# EAGLE board PCB (EAGLE 9.7.0)

No outline drawn. Coordinates in mm, seen from the top.
Copper layers (1*16): Top 0.035mm / dielectric 1.5mm / Bottom 0.035mm
Design rules "Fusion Electronics Design Rules": minimum track width 6mil, minimum drill 0.35mm, track to track 6mil, track to pad 6mil, pad to pad 6mil, via to via 6mil, smd to smd 6mil, copper to edge 40mil, drill to drill 6mil, minimum pad ring 10mil, minimum via ring 8mil, stop-mask expansion 4mil, vias tented up to drill 9999mil, thermal gap 10mil

## Footprints (pad centres in the part's own frame; a part is rotated, then mirrored left to right if it is on the bottom)
2450AT18B100E_ANTC3216X140N = smd 1.15 x 1.8: 1 -1.5,0; 2 1.5,0
ESP32_C6_LIBRARY_1_ESP32_WROVER_EAGLE-LTSPICE_C0402 = smd 0.7 x 0.9: 1 -0.65,0; 2 0.65,0
PERFECT_0402_0402 = smd 0.6 x 0.7: 1 -0.5,0; 2 0.5,0
GRM011R60J152KE01L_1_0201 = smd 0.35 x 0.25: 1 0,0.275; 2 0,-0.275
ESP32_C6_LIBRARY_5_SOD3716X135N = smd 1.15 x 0.8: 1 -1.75,0; 2 1.75,0
ESP32_C6_LIBRARY_3_SOT95P280X145-6N = smd 1.2 x 0.6: 1 -1.25,0.95; 2 -1.25,0; 3 -1.25,-0.95; 4 1.25,-0.95; 5 1.25,0; 6 1.25,0.95
BQ25180YBGR_BGA8C40P2X4_100X155X50 = smd 0.2 x 0.2: A1 -0.2,0.6; A2 0.2,0.6; B1 -0.2,0.2; B2 0.2,0.2; C1 -0.2,-0.2; C2 0.2,-0.2; D1 -0.2,-0.6; D2 0.2,-0.6
RT6160AWSC_BGA15C40P3X5_140X230X60 = smd 0.216 x 0.216: A1 -0.4,0.8; A2 0,0.8; A3 0.4,0.8; B1 -0.4,0.4; B2 0,0.4; B3 0.4,0.4; C1 -0.4,0; C2 0,0; C3 0.4,0; D1 -0.4,-0.4; D2 0,-0.4; D3 0.4,-0.4; E1 -0.4,-0.8; E2 0,-0.8; E3 0.4,-0.8
BMA423_BMA423 = smd 0.3 x 0.35: 1 -0.75,-0.775; 2 -0.25,-0.775; 3 0.25,-0.775; 4 0.75,-0.775; 7 0.75,0.775; 8 0.25,0.775; 9 -0.25,0.775; 10 -0.75,0.775 | smd 0.35 x 0.3: 5 0.775,-0.25; 6 0.775,0.25; 11 -0.775,0.25; 12 -0.775,-0.25
DRV2605YZFR_BGA9C50P3X3_144X144X62 = smd 0.25 x 0.25: A1 -0.5,0.5; A2 0,0.5; A3 0.5,0.5; B1 -0.5,0; B2 0,0; B3 0.5,0; C1 -0.5,-0.5; C2 0,-0.5; C3 0.5,-0.5
TC2030-IDC_TC2030IDC = smd 0.783 x 0.783: 1 -0.953,-0.635; 2 -0.953,0.635; 3 0.317,-0.635; 4 0.317,0.635; 5 1.588,-0.635; 6 1.588,0.635 | hole 2.451: -2.223,-2.54; -2.223,2.54; 0.952,-2.54; 0.952,2.54 | hole 1.067: -2.223,0; 2.857,-1.016; 2.857,1.016
503480-2400_5034802400 = smd 0.3 x 0.7: 1 -5.75,1.525; 2 -5.25,1.525; 3 -4.75,1.525; 4 -4.25,1.525; 5 -3.75,1.525; 6 -3.25,1.525; 7 -2.75,1.525; 8 -2.25,1.525; 9 -1.75,1.525; 10 -1.25,1.525; 11 -0.75,1.525; 12 -0.25,1.525; 13 0.25,1.525; 14 0.75,1.525; 15 1.25,1.525; 16 1.75,1.525; 17 2.25,1.525; 18 2.75,1.525; 19 3.25,1.525; 20 3.75,1.525; 21 4.25,1.525; 22 4.75,1.525; 23 5.25,1.525; 24 5.75,1.525 | smd 0.3 x 1: MP1 -6.54,-1.125; MP2 6.54,-1.125
KH-TYPE-C-16P_KINGHELM_KH-TYPE-C-16P = smd 0.6 x 1.15: A1_B12 -3.2,4.725; A4_B9 -2.4,4.725; A9_B4 2.4,4.725; A12_B1 3.2,4.725 | smd 0.3 x 1.15: A5 -1.25,4.725; A6 -0.25,4.725; A7 0.25,4.725; A8 1.25,4.725; B5 1.75,4.725; B6 0.75,4.725; B7 -0.75,4.725; B8 -1.75,4.725 | drill 0.65 pad 1.05: SH1 -4.32,0; SH2 4.32,0; SH3 -4.32,4.15; SH4 4.32,4.15 | hole 0.7: -2.89,3.65; 2.89,3.65
MLP2016SR47MT0S1_INDC2016X100N = smd 1.2 x 2.2: 1 -1.028,0; 2 1.028,0
ESP32_C6_LIBRARY_2_IND_4828-WE-TPC_WRE = smd 0.9 x 5.3: 1 -2.286,0; 2 2.286,0
ESP32_C6_LIBRARY_6_SOT65P210X110-3N = smd 1.05 x 0.5: 1 -1.05,0.65; 2 -1.05,-0.65; 3 1.05,0
ESP32_C6_LIBRARY_4_ESP32_C6_LIBRARY_4_ESP32_C6_LIBRARY_4_ESP32_C6_LIBRARY_4_ESP32_WROVER_SPARKFUN-DISCRETESEMI_SOT23-3 = smd 0.8 x 0.9: 1 -0.95,-1; 2 0.95,-1; 3 0,1.1
CPF0201D7K68C1_0201 = smd 0.35 x 0.25: 1 0,0.275; 2 0,-0.275
NORDIC_NRF_4_AQFN50P700X700X85_HS-74N = smd 4.85 x 4.85: P$74 0,0 | drill 0.3 pad 0.6: P$75 -1.8,1.8; P$76 -0.6,1.8; P$77 0.6,1.8; P$78 1.8,1.8; P$79 -1.8,0.6; P$80 -0.6,0.6; P$81 0.6,0.6; P$82 1.8,0.6; P$83 -1.8,-0.6; P$84 -0.6,-0.6; P$85 0.6,-0.6; P$86 1.8,-0.6; P$87 -1.8,-1.8; P$88 -0.6,-1.8; P$89 0.6,-1.8; P$90 1.8,-1.8 | smd 0.2 x 0.2: P$A8 -1.25,3.25; P$A10 -0.75,3.25; P$A12 -0.25,3.25; P$A14 0.25,3.25; P$A16 0.75,3.25; P$A18 1.25,3.25; P$A20 1.75,3.25; P$A22 2.25,3.25; P$A23 2.75,3.25; P$AA24 3.25,-2.25; P$AB2 -2.75,-2.5; P$AC5 -2,-2.75; P$AC9 -1,-2.75; P$AC11 -0.5,-2.75; P$AC13 0,-2.75; P$AC15 0.5,-2.75; P$AC17 1,-2.75; P$AC19 1.5,-2.75; P$AC21 2,-2.75; P$AC24 3.25,-2.75; P$AD2 -2.75,-3.25; P$AD4 -2.25,-3.25; P$AD6 -1.75,-3.25; P$AD8 -1.25,-3.25; P$AD10 -0.75,-3.25; P$AD12 -0.25,-3.25; P$AD14 0.25,-3.25; P$AD16 0.75,-3.25; P$AD18 1.25,-3.25; P$AD20 1.75,-3.25; P$AD22 2.25,-3.25; P$AD23 2.75,-3.25; P$B1 -3.25,2.75; P$B3 -2.5,2.75; P$B5 -2,2.75; P$B7 -1.5,2.75; P$B9 -1,2.75; P$B11 -0.5,2.75; P$B13 0,2.75; P$B15 0.5,2.75; P$B17 1,2.75; P$B19 1.5,2.75; P$B24 3.25,2.75; P$C1 -3.25,2.25; P$D2 -2.75,2; P$D23 2.75,2; P$E24 3.25,1.75; P$F2 -2.75,1.5; P$F23 2.75,1.5; P$G1 -3.25,1.25; P$H2 -2.75,1; P$H23 2.75,1; P$J1 -3.25,0.75; P$J24 3.25,0.75; P$K2 -2.75,0.5; P$L1 -3.25,0.25; P$L24 3.25,0.25; P$M2 -2.75,0; P$N1 -3.25,-0.25; P$N24 3.25,-0.25; P$P2 -2.75,-0.5; P$P23 2.75,-0.5; P$R1 -3.25,-0.75; P$R24 3.25,-0.75; P$T2 -2.75,-1; P$T23 2.75,-1; P$U1 -3.25,-1.25; P$U24 3.25,-1.25; P$V23 2.75,-1.5; P$W1 -3.25,-1.75; P$W24 3.25,-1.75; P$Y2 -2.75,-2; P$Y23 2.75,-2
ESP32_C6_LIBRARY_7_JUMPER_SJ = smd 1.168 x 1.6: 1 -0.762,0; 2 0.762,0
2025-10-22_07-23-44_LIBRARY_SW_EVP-AKE31A_PAN = smd 0.711 x 1.092: 1 -1.4,-0.972; 2 1.4,-0.972 | drill 0.559 pad 0.914 square: 3 -1.848,0.381; 4 1.848,0.381 | smd 1.397 x 1.092: 5 0,-1.124
HECTOR_WATCH_1_TP20R = smd 2 x 2: TP 0,0
ESP32_C6_LIBRARY_SON50P200X200X80-9N = smd 0.76 x 0.27: 1 -0.985,0.75; 2 -0.985,0.25; 3 -0.985,-0.25; 4 -0.985,-0.75; 5 0.985,-0.75; 6 0.985,-0.25; 7 0.985,0.25; 8 0.985,0.75 | smd 0.9 x 1.3: 9 0,0
NORDIC_NRF_1_XTAL_3215_N = smd 1 x 1.8: 1 -1.25,0; 2 1.25,0
NORDIC_NRF_BT-XTAL_2016_N = smd 0.95 x 0.85: 1 -0.725,-0.575; 2 0.725,-0.575; 3 0.725,0.575; 4 -0.725,0.575
NORDIC_NRF_2_RESC0402_L = smd 0.5 x 0.6: 1 -0.5,0; 2 0.5,0

## Placement (x,y rotation side)
ANT1  2450AT18B100E_2450AT18B100E  [2450AT18B100E_ANTC3216X140N]  -27.94,167.64 0 top
C1  1uF  [ESP32_C6_LIBRARY_1_ESP32_WROVER_EAGLE-LTSPICE_C0402]  -22.86,149.86 0 top
C2  10uF  [ESP32_C6_LIBRARY_1_ESP32_WROVER_EAGLE-LTSPICE_C0402]  -17.78,149.86 0 top
C3  1uF  [ESP32_C6_LIBRARY_1_ESP32_WROVER_EAGLE-LTSPICE_C0402]  -27.94,149.86 0 top
C4  10uF  [PERFECT_0402_0402]  -36.83,160.02 0 top
C5  22uF  [PERFECT_0402_0402]  -40.64,160.02 0 top
C6  22uF  [PERFECT_0402_0402]  -44.45,160.02 0 top
C7  0.1uF  [GRM011R60J152KE01L_1_0201]  -44.45,167.64 0 top
C8  100nF  [GRM011R60J152KE01L_1_0201]  -46.99,167.64 0 top
C9  12pF  [GRM011R60J152KE01L_1_0201]  -49.53,167.64 0 top
C10  12pF  [GRM011R60J152KE01L_1_0201]  -52.07,167.64 0 top
C11  12pF  [GRM011R60J152KE01L_1_0201]  -54.61,167.64 0 top
C12  12pF  [GRM011R60J152KE01L_1_0201]  -57.15,167.64 0 top
C13  1pF  [GRM011R60J152KE01L_1_0201]  -59.69,167.64 0 top
C14  1pF  [GRM011R60J152KE01L_1_0201]  -62.23,167.64 0 top
C15  1pF  [GRM011R60J152KE01L_1_0201]  -64.77,167.64 0 top
C16  1pF  [GRM011R60J152KE01L_1_0201]  -67.31,167.64 0 top
C17  820pF  [GRM011R60J152KE01L_1_0201]  -69.85,167.64 0 top
C18  100nF  [GRM011R60J152KE01L_1_0201]  -72.39,167.64 0 top
C19  100nF  [GRM011R60J152KE01L_1_0201]  -74.93,167.64 0 top
C20  4.7uF  [GRM011R60J152KE01L_1_0201]  -77.47,167.64 0 top
C21  4.7uF  [GRM011R60J152KE01L_1_0201]  -80.01,167.64 0 top
C22  100nF  [GRM011R60J152KE01L_1_0201]  -82.55,167.64 0 top
C23  4.7uF  [GRM011R60J152KE01L_1_0201]  -85.09,167.64 0 top
C24  100nF  [GRM011R60J152KE01L_1_0201]  -87.63,167.64 0 top
C25  N.C.  [GRM011R60J152KE01L_1_0201]  -90.17,167.64 0 top
C26  100pF  [GRM011R60J152KE01L_1_0201]  -92.71,167.64 0 top
C27  N.C.  [GRM011R60J152KE01L_1_0201]  -95.25,167.64 0 top
C28  1.0uF  [GRM011R60J152KE01L_1_0201]  -97.79,167.64 0 top
C29  47nF  [GRM011R60J152KE01L_1_0201]  -100.33,167.64 0 top
C30  4.7uF  [GRM011R60J152KE01L_1_0201]  -102.87,167.64 0 top
C31  0.1uF  [PERFECT_0402_0402]  -21.59,160.02 0 top
C32  4.7uF/25V  [PERFECT_0402_0402]  -77.47,154.94 0 top
C33  10uF  [PERFECT_0402_0402]  -48.26,160.02 0 top
C34  1uF/50V  [PERFECT_0402_0402]  -90.17,154.94 0 top
C35  1uF/50V  [PERFECT_0402_0402]  -96.52,154.94 0 top
C36  0.1uF/50V  [PERFECT_0402_0402]  -83.82,154.94 0 top
C37  1uF/50V  [PERFECT_0402_0402]  -102.87,154.94 0 top
C38  1uF/50V  [PERFECT_0402_0402]  -109.22,154.94 0 top
C39  1uF/50V  [PERFECT_0402_0402]  -115.57,154.94 0 top
C40  1uF/50V  [PERFECT_0402_0402]  -121.92,154.94 0 top
C41  1uF/50V  [PERFECT_0402_0402]  -128.27,154.94 0 top
C42  1uF/50V  [PERFECT_0402_0402]  -134.62,154.94 0 top
C43  1uF/50V  [PERFECT_0402_0402]  -17.78,160.02 0 top
C44  1uF  [PERFECT_0402_0402]  -52.07,160.02 0 top
C45  0.1uF  [PERFECT_0402_0402]  -25.4,160.02 0 top
C46  1uF  [PERFECT_0402_0402]  -55.88,160.02 0 top
C47  1uF  [PERFECT_0402_0402]  -59.69,160.02 0 top
C48  1uF  [PERFECT_0402_0402]  -63.5,160.02 0 top
C49  0.1uF  [PERFECT_0402_0402]  -29.21,160.02 0 top
C50  4.7uF  [PERFECT_0402_0402]  -33.02,160.02 0 top
D1  ESP32_C6_LIBRARY_5_MBR0530  [ESP32_C6_LIBRARY_5_SOD3716X135N]  -115.57,160.02 0 top
D2  ESP32_C6_LIBRARY_5_MBR0530  [ESP32_C6_LIBRARY_5_SOD3716X135N]  -27.94,163.83 0 top
D3  ESP32_C6_LIBRARY_5_MBR0530  [ESP32_C6_LIBRARY_5_SOD3716X135N]  -58.42,163.83 0 top
D4  ESP32_C6_LIBRARY_3_USBLC6-2SC6Y  [ESP32_C6_LIBRARY_3_SOT95P280X145-6N]  -82.55,160.02 0 top
IC1  BQ25180YBGR_BQ25180YBGR  [BQ25180YBGR_BGA8C40P2X4_100X155X50]  -58.42,154.94 0 top
IC2  RT6160AWSC_RT6160AWSC  [RT6160AWSC_BGA15C40P3X5_140X230X60]  -26.67,154.94 0 top
IC3  BMA423_BMA423  [BMA423_BMA423]  -38.1,149.86 0 top
IC4  DRV2605YZFR_DRV2605YZFR  [DRV2605YZFR_BGA9C50P3X3_144X144X62]  -102.87,142.24 0 top
J1  TC2030-IDC_TC2030-IDC  [TC2030-IDC_TC2030IDC]  -80.01,132.08 0 top
J2  503480-2400_503480-2400  [503480-2400_5034802400]  -77.47,143.51 0 top
J3  KH-TYPE-C-16P_KH-TYPE-C-16P  [KH-TYPE-C-16P_KINGHELM_KH-TYPE-C-16P]  -36.83,129.54 0 top
L1  MLP2016SR47MT0S1_FTC252012SR47MBCA  [MLP2016SR47MT0S1_INDC2016X100N]  -115.57,130.81 0 top
L2  68uH  [ESP32_C6_LIBRARY_2_IND_4828-WE-TPC_WRE]  -109.22,102.87 0 top
Q1  ESP32_C6_LIBRARY_6_SI1308EDL-T1-GE3  [ESP32_C6_LIBRARY_6_SOT65P210X110-3N]  -92.71,163.83 0 top
Q2  20V/4.2A/52mΩ/1.4W  [ESP32_C6_LIBRARY_4_ESP32_C6_LIBRARY_4_ESP32_C6_LIBRARY_4_ESP32_C6_LIBRARY_4_ESP32_WROVER_SPARKFUN-DISCRETESEMI_SOT23-3]  -92.71,132.08 0 top
R1  10k  [CPF0201D7K68C1_0201]  -105.41,167.64 0 top
R2  3K3  [CPF0201D7K68C1_0201]  -107.95,167.64 0 top
R3  3K3  [CPF0201D7K68C1_0201]  -110.49,167.64 0 top
R4  0  [CPF0201D7K68C1_0201]  -113.03,167.64 0 top
R5  0  [CPF0201D7K68C1_0201]  -115.57,167.64 0 top
R6  0  [CPF0201D7K68C1_0201]  -118.11,167.64 0 top
R7  0.47  [CPF0201D7K68C1_0201]  -120.65,167.64 0 top
R8  10K  [CPF0201D7K68C1_0201]  -123.19,167.64 0 top
R9  2.2  [CPF0201D7K68C1_0201]  -125.73,167.64 0 top
R10  10K  [CPF0201D7K68C1_0201]  -128.27,167.64 0 top
R11  10k  [CPF0201D7K68C1_0201]  -130.81,167.64 0 top
R12  10k  [CPF0201D7K68C1_0201]  -133.35,167.64 0 top
R13  10k  [CPF0201D7K68C1_0201]  -135.89,167.64 0 top
R14  5K1  [CPF0201D7K68C1_0201]  -13.97,170.18 0 top
R15  5K1  [CPF0201D7K68C1_0201]  -16.51,170.18 0 top
RESET  NORDIC_NRF_4_NRF52840_QF  [NORDIC_NRF_4_AQFN50P700X700X85_HS-74N]  -62.23,132.08 0 top
SJ1  [ESP32_C6_LIBRARY_7_JUMPER_SJ]  -41.91,153.67 0 top
SW1  2025-10-22_07-23-44_LIBRARY_EVP-AKE31ASW_EVP-AKE31A_PAN  [2025-10-22_07-23-44_LIBRARY_SW_EVP-AKE31A_PAN]  -69.85,29.21 0 top
SW2  2025-10-22_07-23-44_LIBRARY_EVP-AKE31ASW_EVP-AKE31A_PAN  [2025-10-22_07-23-44_LIBRARY_SW_EVP-AKE31A_PAN]  -69.85,71.12 0 top
SW3  2025-10-22_07-23-44_LIBRARY_EVP-AKE31ASW_EVP-AKE31A_PAN  [2025-10-22_07-23-44_LIBRARY_SW_EVP-AKE31A_PAN]  -69.85,113.03 0 top
TP1  HECTOR_WATCH_1_TPTP20R  [HECTOR_WATCH_1_TP20R]  -81.28,148.59 0 top
TP2  HECTOR_WATCH_1_TPTP20R  [HECTOR_WATCH_1_TP20R]  -86.36,148.59 0 top
TP3  HECTOR_WATCH_1_TPTP20R  [HECTOR_WATCH_1_TP20R]  -91.44,148.59 0 top
TP4  HECTOR_WATCH_1_TPTP20R  [HECTOR_WATCH_1_TP20R]  -96.52,148.59 0 top
TP5  HECTOR_WATCH_1_TPTP20R  [HECTOR_WATCH_1_TP20R]  -101.6,148.59 0 top
TP6  HECTOR_WATCH_1_TPTP20R  [HECTOR_WATCH_1_TP20R]  -106.68,148.59 0 top
TP7  HECTOR_WATCH_1_TPTP20R  [HECTOR_WATCH_1_TP20R]  -111.76,148.59 0 top
TP8  HECTOR_WATCH_1_TPTP20R  [HECTOR_WATCH_1_TP20R]  -116.84,148.59 0 top
TP9  HECTOR_WATCH_1_TPTP20R  [HECTOR_WATCH_1_TP20R]  -121.92,148.59 0 top
TP10  HECTOR_WATCH_1_TPTP20R  [HECTOR_WATCH_1_TP20R]  -50.8,148.59 0 top
TP11  HECTOR_WATCH_1_TPTP20R  [HECTOR_WATCH_1_TP20R]  -76.2,148.59 0 top
TP12  HECTOR_WATCH_1_TPTP20R  [HECTOR_WATCH_1_TP20R]  -57.15,148.59 0 top
TP13  HECTOR_WATCH_1_TPTP20R  [HECTOR_WATCH_1_TP20R]  -63.5,148.59 0 top
TP14  HECTOR_WATCH_1_TPTP20R  [HECTOR_WATCH_1_TP20R]  -69.85,148.59 0 top
U1  ESP32_C6_LIBRARY_MAX17048G+T10  [ESP32_C6_LIBRARY_SON50P200X200X80-9N]  -52.07,143.51 0 top
U$1  32.768kHz  [NORDIC_NRF_1_XTAL_3215_N]  -60.96,143.51 0 top
U$2  32MHz  [NORDIC_NRF_BT-XTAL_2016_N]  -16.51,143.51 0 top
U$3  3.9nH  [NORDIC_NRF_2_RESC0402_L]  -121.92,142.24 0 top
U$4  15nH  [NORDIC_NRF_2_RESC0402_L]  -128.27,142.24 0 top
U$5  10uH  [NORDIC_NRF_2_RESC0402_L]  -134.62,142.24 0 top

## Library data of the parts
ANT1 = InkTime_v5; ARROW_PART_NUMBER: 2450AT18B100E; ARROW_PRICE-STOCK: https://www.arrow.com/en/products/2450at18b100e/johanson-dielectrics?utm_currency=USD&region=nac; DESCRIPTION: Antennas 2.45GHz ANTENNA; HEIGHT: 1.4mm; MANUFACTURER_NAME: JOHANSON TECHNOLOGY; MANUFACTURER_PART_NUMBER: 2450AT18B100E; MOUSER_PART_NUMBER: 609-2450AT18B100E; MOUSER_PRICE-STOCK: https://www.mouser.co.uk/ProductDetail/Johanson-Technology/2450AT18B100E?qs=yCnrNFeXz%252Bh5MFsFIXGZGA%3D%3D
C1-C3 = InkTime_v5; SPICEMODEL: NONE; SPICEPREFIX: C
C4-C50 R1-R15 RESET SJ1 TP1-TP14 U$1-U$5 = InkTime_v5
D1-D3 = InkTime_v5; AVAILABILITY: In Stock; CHECK_PRICES: https://www.snapeda.com/parts/MBR0530/Onsemi/view-part/?ref=eda; DESCRIPTION: Diode Schottky 30 V 500mA Surface Mount SOD-123; MF: ON Semiconductor; MP: MBR0530; PACKAGE: SOD-123-2 ON Semiconductor; PRICE: None; PURCHASE-URL: https://www.snapeda.com/api/url_track_click_mouser/?unipart_id=179458&manufacturer=ON Semiconductor&part_name=MBR0530&search_term=None; SNAPEDA_LINK: https://www.snapeda.com/parts/MBR0530/Onsemi/view-part/?ref=snap
D4 = InkTime_v5; AVAILABILITY: In Stock; CHECK_PRICES: https://www.snapeda.com/parts/USBLC6-2SC6Y/STMicroelectronics/view-part/?ref=eda; DESCRIPTION: 17V Clamp 5A (8/20µs) Ipp Tvs Diode Surface Mount SOT-23-6; MF: STMicroelectronics; MP: USBLC6-2SC6Y; PACKAGE: SOT-23-6 STMicroelectronics; PRICE: None; SNAPEDA_LINK: https://www.snapeda.com/parts/USBLC6-2SC6Y/STMicroelectronics/view-part/?ref=snap
IC1 = InkTime_v5; ARROW_PART_NUMBER: BQ25180YBGR; ARROW_PRICE-STOCK: https://www.arrow.com/en/products/bq25180ybgr/texas-instruments?utm_currency=USD&region=nac; DESCRIPTION: Charger IC Lithium Ion/Polymer, Lithium Iron Phosphate 8-DSBGA (1.6x1.1); HEIGHT: 0.5mm; MANUFACTURER_NAME: Texas Instruments; MANUFACTURER_PART_NUMBER: BQ25180YBGR; MOUSER_PART_NUMBER: 595-BQ25180YBGR; MOUSER_PRICE-STOCK: https://www.mouser.co.uk/ProductDetail/Texas-Instruments/BQ25180YBGR?qs=doiCPypUmgEWjAK%252BJAX6Tw%3D%3D
IC2 = InkTime_v5; DESCRIPTION: Buck-Boost Regulator Positive Output Step-Up/Step-Down I2C DC-DC Controller IC 15-WL-CSP (BSC) (1.4x2.3); HEIGHT: 0.6mm; MANUFACTURER_NAME: RICHTEK; MANUFACTURER_PART_NUMBER: RT6160AWSC; MOUSER_PART_NUMBER: 835-RT6160AWSC; MOUSER_PRICE-STOCK: https://www.mouser.co.uk/ProductDetail/Richtek/RT6160AWSC?qs=amGC7iS6iy%2FLd9PSoixZXQ%3D%3D
IC3 = InkTime_v5; ARROW_PART_NUMBER: BMA423; ARROW_PRICE-STOCK: https://www.arrow.com/en/products/bma423/bosch; DESCRIPTION: Accelerometers Triaxial low-g 12bit Acceleration Sensor; HEIGHT: 1mm; MANUFACTURER_NAME: BOSCH; MANUFACTURER_PART_NUMBER: BMA423; MOUSER_PART_NUMBER: 262-BMA423; MOUSER_PRICE-STOCK: https://www.mouser.co.uk/ProductDetail/Bosch-Sensortec/BMA423?qs=HXFqYaX1Q2xC%252BSgeGoX3mg%3D%3D
IC4 = InkTime_v5; ARROW_PART_NUMBER: DRV2605YZFR; ARROW_PRICE-STOCK: https://www.arrow.com/en/products/drv2605yzfr/texas-instruments?region=nac; DESCRIPTION: Haptic Driver for ERM/LRA with Built-In Library and Smart Loop Architecture; HEIGHT: 0.625mm; MANUFACTURER_NAME: Texas Instruments; MANUFACTURER_PART_NUMBER: DRV2605YZFR
J1 = InkTime_v5; DESCRIPTION: CABLE ADAPTER 6 POS; HEIGHT: 19mm; MANUFACTURER_NAME: Tag Connect; MANUFACTURER_PART_NUMBER: TC2030-IDC
J2 = InkTime_v5; DESCRIPTION: FFC & FPC Connectors 0.5mm FPC RA SMT Dual Contact 24Ckt; HEIGHT: 1.87mm; MANUFACTURER_NAME: Molex; MANUFACTURER_PART_NUMBER: 503480-2400; MOUSER_PART_NUMBER: 538-503480-2400; MOUSER_PRICE-STOCK: https://www.mouser.co.uk/ProductDetail/Molex/503480-2400?qs=OAhjpuo3Vu7efIoxFh9AOw%3D%3D
J3 = InkTime_v5; AVAILABILITY: Not in stock; CHECK_PRICES: https://www.snapeda.com/parts/KH-TYPE-C-16P/Kinghelm/view-part/?ref=eda; MF: kinghelm; MP: KH-TYPE-C-16P; PACKAGE: None; PRICE: None; SNAPEDA_LINK: https://www.snapeda.com/parts/KH-TYPE-C-16P/Kinghelm/view-part/?ref=snap
L1 = InkTime_v5; DESCRIPTION: SMD / SMT Inductors (Coils), L=0.47?H, L x W x T :; HEIGHT: 1mm; JLCPCB: https://jlcpcb.com/partdetail/6763488-FTC252012SR47MBCA/C5832368; MANUFACTURER_NAME: TDK; MANUFACTURER_PART_NUMBER: FTC252012SR47MBCA
L2 = InkTime_v5; COPYRIGHT: Copyright (C) 2024 Ultra Librarian. All rights reserved.; MANUFACTURER_PART_NUMBER: 744043680; MFR_NAME: Wurth Electronics
Q1 = InkTime_v5; AVAILABILITY: In Stock; CHECK_PRICES: https://www.snapeda.com/parts/SI1308EDL-T1-GE3/Vishay+Siliconix/view-part/?ref=eda; DESCRIPTION: Si1308EDL-T1-GE3 N-channel MOSFET Transistor, 1.5 A, 30 V, 3-Pin SC-70 | Siliconix / Vishay SI1308EDL-T1-GE3; MF: Vishay Siliconix; MP: SI1308EDL-T1-GE3; PACKAGE: SOT-323 Vishay Semiconductor; PRICE: None; PURCHASE-URL: https://www.snapeda.com/api/url_track_click_mouser/?unipart_id=274603&manufacturer=Vishay Siliconix&part_name=SI1308EDL-T1-GE3&search_term=None; SNAPEDA_LINK: https://www.snapeda.com/parts/SI1308EDL-T1-GE3/Vishay+Siliconix/view-part/?ref=snap
Q2 = InkTime_v5; PROD_ID: TRAN-14388
SW1-SW3 = InkTime_v5; COPYRIGHT: Copyright (C) 2025 Ultra Librarian. All rights reserved.; DIGI-KEY_PART_NUMBER_1: P123437TR-ND; DIGI-KEY_PART_NUMBER_2: P123437CT-ND; DIGI-KEY_PART_NUMBER_3: P123437DKR-ND; MANUFACTURER_NAME: Panasonic; MANUFACTURER_PART_NUMBER: EVP-AKE31A
U1 = InkTime_v5; AVAILABILITY: In Stock; CHECK_PRICES: https://www.snapeda.com/parts/MAX17048G+T10/Analog+Devices/view-part/?ref=eda; DESCRIPTION: 3µA 1-Cell/2-Cell Fuel Gauge with ModelGauge; MF: Analog Devices; MP: MAX17048G+T10; PACKAGE: TDFN-8 Maxim; PRICE: None; PURCHASE-URL: https://www.snapeda.com/api/url_track_click_mouser/?unipart_id=329239&manufacturer=Analog Devices&part_name=MAX17048G+T10&search_term=None; SNAPEDA_LINK: https://www.snapeda.com/parts/MAX17048G+T10/Analog+Devices/view-part/?ref=snap

## Nets
3V3: C5.1 C6.1 C8.2 C19.2 C23.2 C24.1 C30.2 C45.1 IC2.E3 IC3.3 IC3.7 IC3.10 IC4.C2 J1.1 Q2.2 R10.2 R11.2 R12.2 R13.2 RESET.P$A22 RESET.P$AD14 RESET.P$B1 RESET.P$W1 RESET.P$Y2 TP3.TP
3V3/2.4A: R2.1 R3.1 TP9.TP
ALERT: RESET.P$J24 U1.5
D+: D4.4 RESET.P$AD6
D-: D4.6 RESET.P$AD4
DN: D4.1 J3.A7 J3.B7
DP: D4.3 J3.A6 J3.B6
EPD_3V3: C36.2 J2.15 J2.16 Q2.3
EPD_BUSY: J2.9 RESET.P$AD12
EPD_CS: J2.12 RESET.P$K2
EPD_DC: J2.11 RESET.P$AD10
EPD_RST: J2.10 RESET.P$AC11
GDR: J2.2 Q1.1 R8.2
GND: C1.2 C2.2 C3.2 C4.1 C5.2 C6.2 C7.2 C8.1 C9.1 C10.1 C11.2 C12.2 C13.2 C14.2 C15.2 C17.2 C18.2 C19.1 C20.1 C21.1 C22.1 C23.1 C24.2 C25.2 C26.2 C27.2 C28.2 C29.2 C30.1 C31.2 C33.2 C34.1 C35.1 C36.1 C37.1 C38.1 C39.1 C40.1 C41.1 C42.1 C43.1 C44.2 C45.2 C46.2 C47.2 C48.2 C49.2 C50.2 D2.1 D4.2 IC1.D2 IC2.B1 IC2.C1 IC2.C2 IC2.C3 IC3.1 IC3.8 IC3.9 IC4.B1 IC4.B3 J1.3 J1.5 J2.8 J2.17 J2.MP1 J2.MP2 J3.A1_B12 J3.A12_B1 J3.SH1 J3.SH2 J3.SH3 J3.SH4 R1.1 R6.1 R6.2 R8.1 R9.1 R14.1 R15.2 RESET.P$74 RESET.P$75 RESET.P$76 RESET.P$77 RESET.P$78 RESET.P$79 RESET.P$80 RESET.P$81 RESET.P$82 RESET.P$83 RESET.P$84 RESET.P$85 RESET.P$86 RESET.P$87 RESET.P$88 RESET.P$89 RESET.P$90 RESET.P$B7 RESET.P$F23 SJ1.1 SW1.1 SW2.1 SW3.1 TP10.TP TP12.TP U1.1 U1.4 U1.6 U1.9 U$2.2 U$2.4
HAPTIC_EN: IC4.A1 RESET.P$U1
IMU_INT1: IC3.5 RESET.P$N1
IMU_INT2: IC3.6 RESET.P$P2
LX1: IC2.B2 L1.1
LX2: IC2.D2 IC2.D3 L1.2
MOSI: J2.14 RESET.P$B13
N$1: C11.1 RESET.P$A23 U$2.3
N$2: C12.1 RESET.P$B24 U$2.1
N$3: IC1.D1 R1.2
N$4: ANT1.1 C14.1 C15.1 U$3.2
N$5: C13.1 RESET.P$H23 U$3.1
N$6: C17.1 RESET.P$N24
N$7: C18.1 RESET.P$AD23
N$8: C27.1 RESET.P$A18
N$9: C25.1 C28.1 C29.1 RESET.P$B5 RESET.P$E24 U$4.2
N$10: C26.1 RESET.P$D23
N$11: U$4.1 U$5.2
N$12: IC2.E1 R5.2
N$13: IC2.D1 R4.2
N$14: RESET.P$B3 U$5.1
N$15: C33.1 L2.2
N$16: C32.2 D3.2 L2.1 Q1.3
N$17: C32.1 D1.1 D2.2
N$18: C34.2 J2.4
N$19: C31.1 U1.3
N$20: C35.2 J2.5
N$21: C44.1 IC4.A2
N$23: R7.1 R9.2 SJ1.2
N$24: C37.2 J2.18
N$25: C38.2 J2.19
N$26: C39.2 J2.20
N$27: J3.B5 R15.1
N$28: C41.2 J2.22
N$29: J3.A5 R14.2
N$30: C43.2 J2.24
OUT+: IC4.A3 TP14.TP
OUT-: IC4.C3 TP13.TP
P0.00/XL1: C9.2 RESET.P$D2 U$1.1
P0.01/XL2: C10.2 RESET.P$F2 U$1.2
P0.04: RESET.P$J1
P0.09: RESET.P$L24
P0.13: C46.1 R11.1 RESET.P$AD8 SW1.2
P0.14: C47.1 R12.1 RESET.P$AC9 SW2.2
P0.19: RESET.P$AC15
P0.20: RESET.P$AD16
P0.21: RESET.P$AC17
P0.22: RESET.P$AD18
P0.23: RESET.P$AC19
P0.24: RESET.P$AD20
P0.25: RESET.P$AC21
P0.26: RESET.P$G1
P0.27: RESET.P$H2
P0.28: RESET.P$B11
P0.29: RESET.P$A10
P0.30: RESET.P$B9
P0.31: RESET.P$A8
P1.01: Q2.1 R10.1 RESET.P$Y23
P1.02: C48.1 R13.1 RESET.P$W24 SW3.2
P1.03: RESET.P$V23
P1.04: RESET.P$U24
P1.05: RESET.P$T23
P1.06: RESET.P$R24
P1.07: RESET.P$P23
P1.09: RESET.P$R1
P1.10: RESET.P$A20
P1.11: RESET.P$B19
P1.12: RESET.P$B17
P1.13: RESET.P$A16
P1.14: RESET.P$B15
P1.15: RESET.P$A14
PMIC_INT: IC1.A1 RESET.P$T2
PREVGH: C40.2 D3.1 J2.21
PREVGL: C42.2 D1.2 J2.23
RESE: J2.3 Q1.2 R7.2
RESET: J1.6 RESET.P$AC13 TP8.TP
SCK: J2.13 RESET.P$A12
SCL: IC1.B1 IC3.12 IC4.C1 R2.2 R4.1 RESET.P$M2 TP1.TP U1.7
SDA: IC1.C1 IC3.2 IC4.B2 R3.2 R5.1 RESET.P$L1 TP2.TP U1.8
SWDCLK: J1.4 RESET.P$AA24 TP7.TP
SWDIO: J1.2 RESET.P$AC24 TP6.TP
SWO: RESET.P$AD22 TP5.TP
VBAT: C3.1 IC1.C2 TP11.TP U1.2
VBUS: C1.1 C20.2 C49.1 C50.1 D4.5 IC1.A2 J3.A4_B9 J3.A9_B4 RESET.P$AD2
VBUS/2.6D1: C21.2 RESET.P$AC5
VBUS/2.6D2: C22.2 RESET.P$C1
VREG: C2.1 C4.2 C7.1 IC1.B2 IC2.A1 IC2.A2 IC2.A3 TP4.TP

## Tracks (layer width: path | path; a pad name or v marks a point on that pad's centre or on a via)
3V3  (24 unrouted)
3V3/2.4A  (2 unrouted)
ALERT  (1 unrouted)
D+  (1 unrouted)
D-  (1 unrouted)
DN  (2 unrouted)
DP  (2 unrouted)
EPD_3V3  (3 unrouted)
EPD_BUSY  (1 unrouted)
EPD_CS  (1 unrouted)
EPD_DC  (1 unrouted)
EPD_RST  (1 unrouted)
GDR  (2 unrouted)
GND  (109 unrouted)
HAPTIC_EN  (1 unrouted)
IMU_INT1  (1 unrouted)
IMU_INT2  (1 unrouted)
LX1  (1 unrouted)
LX2  (2 unrouted)
MOSI  (1 unrouted)
N$1  (2 unrouted)
N$2  (2 unrouted)
N$3  (1 unrouted)
N$4  (3 unrouted)
N$5  (2 unrouted)
N$6  (1 unrouted)
N$7  (1 unrouted)
N$8  (1 unrouted)
N$9  (5 unrouted)
N$10  (1 unrouted)
N$11  (1 unrouted)
N$12  (1 unrouted)
N$13  (1 unrouted)
N$14  (1 unrouted)
N$15  (1 unrouted)
N$16  (3 unrouted)
N$17  (2 unrouted)
N$18  (1 unrouted)
N$19  (1 unrouted)
N$20  (1 unrouted)
N$21  (1 unrouted)
N$23  (2 unrouted)
N$24  (1 unrouted)
N$25  (1 unrouted)
N$26  (1 unrouted)
N$27  (1 unrouted)
N$28  (1 unrouted)
N$29  (1 unrouted)
N$30  (1 unrouted)
OUT+  (1 unrouted)
OUT-  (1 unrouted)
P0.00/XL1  (2 unrouted)
P0.01/XL2  (2 unrouted)
P0.13  (3 unrouted)
P0.14  (3 unrouted)
P1.01  (2 unrouted)
P1.02  (3 unrouted)
PMIC_INT  (1 unrouted)
PREVGH  (2 unrouted)
PREVGL  (2 unrouted)
RESE  (2 unrouted)
RESET  (2 unrouted)
SCK  (1 unrouted)
SCL  (7 unrouted)
SDA  (7 unrouted)
SWDCLK  (2 unrouted)
SWDIO  (2 unrouted)
SWO  (1 unrouted)
VBAT  (3 unrouted)
VBUS  (8 unrouted)
VBUS/2.6D1  (1 unrouted)
VBUS/2.6D2  (1 unrouted)
VREG  (7 unrouted)